# EAGLE board CSv2_exp_boardx (EAGLE 9.6.2)
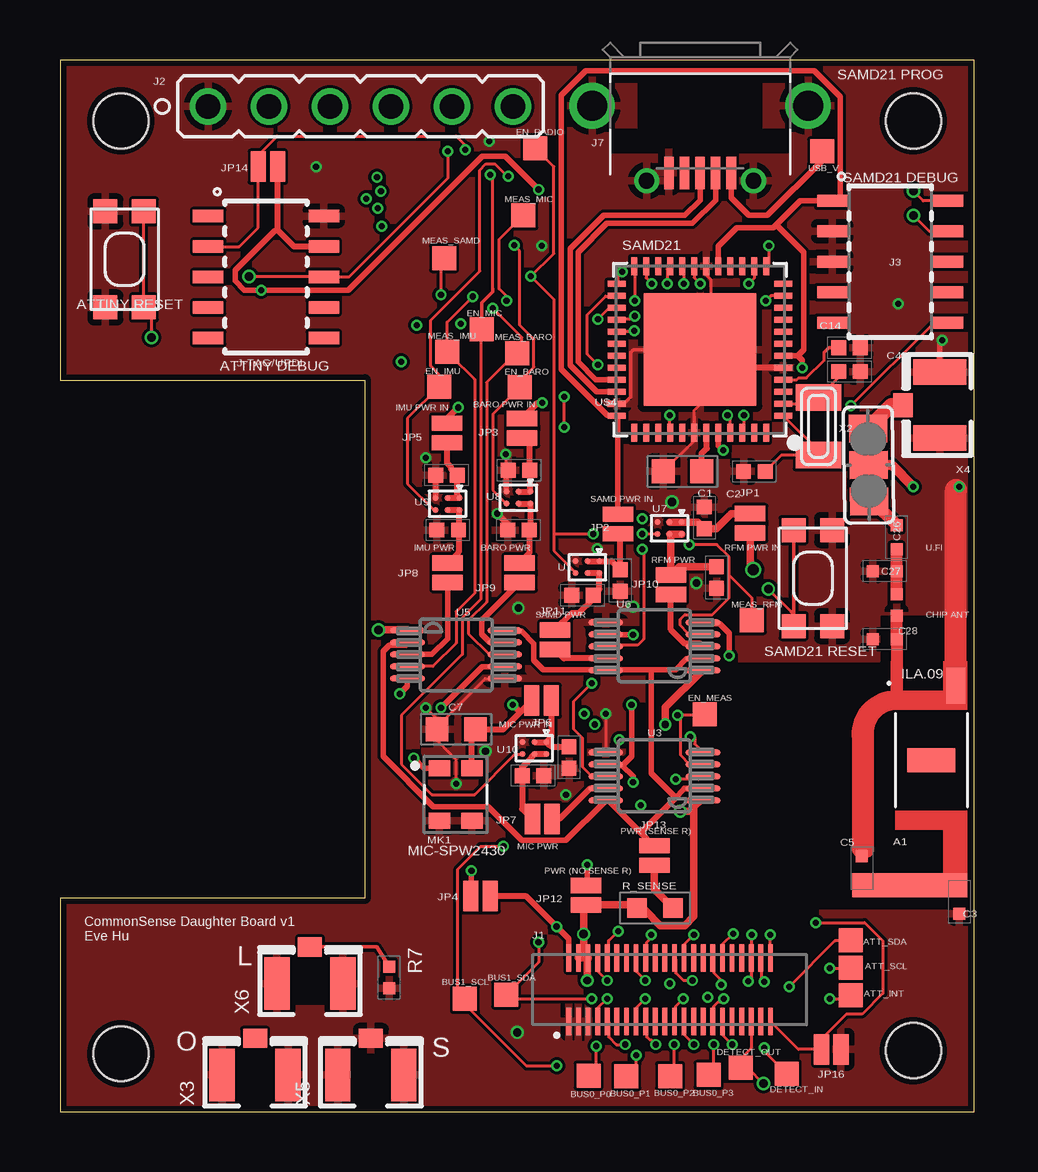
[diagram p0: board, top side]
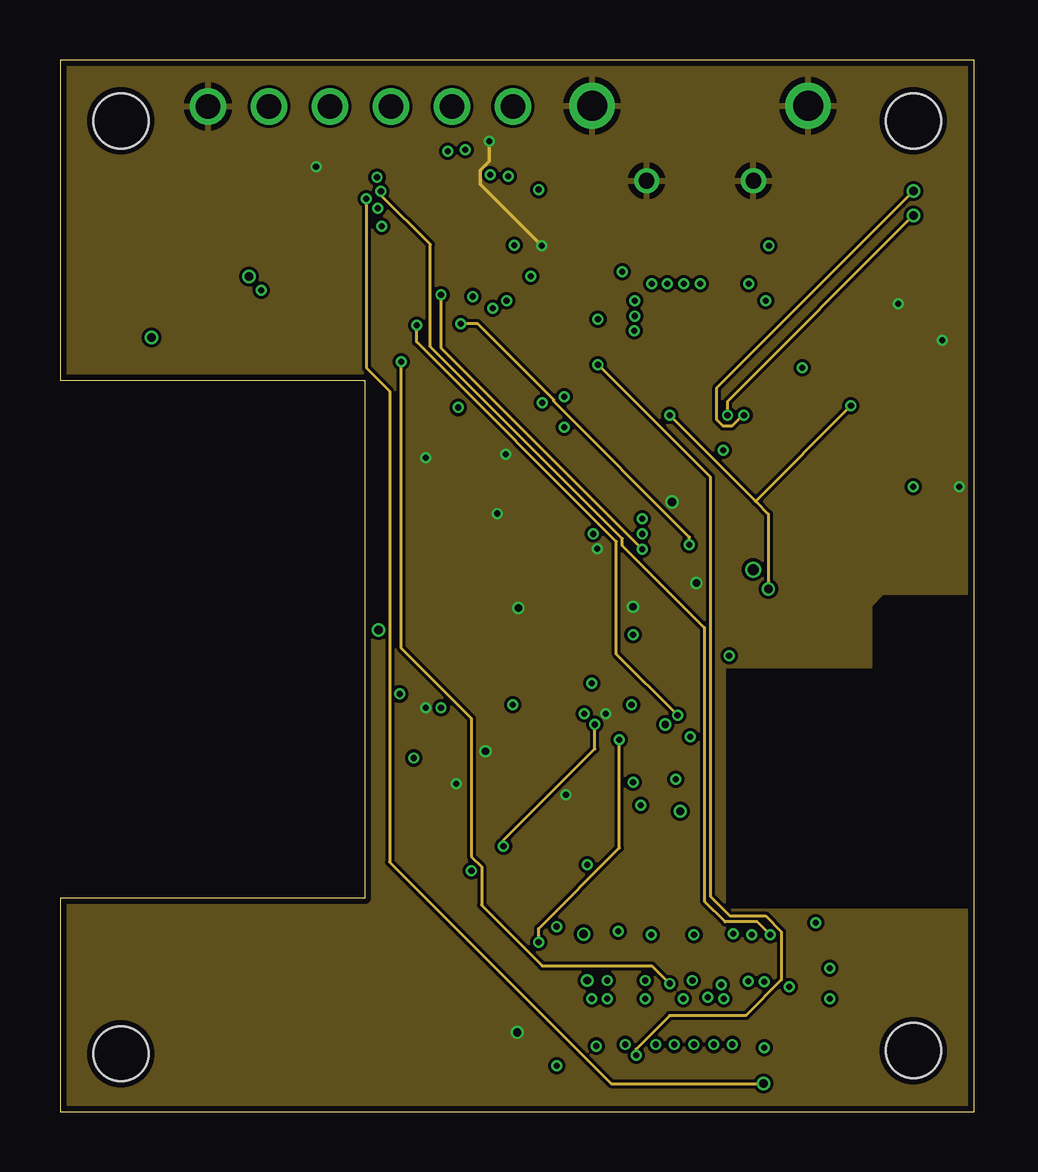
[diagram p1: board, inner layer Route2]
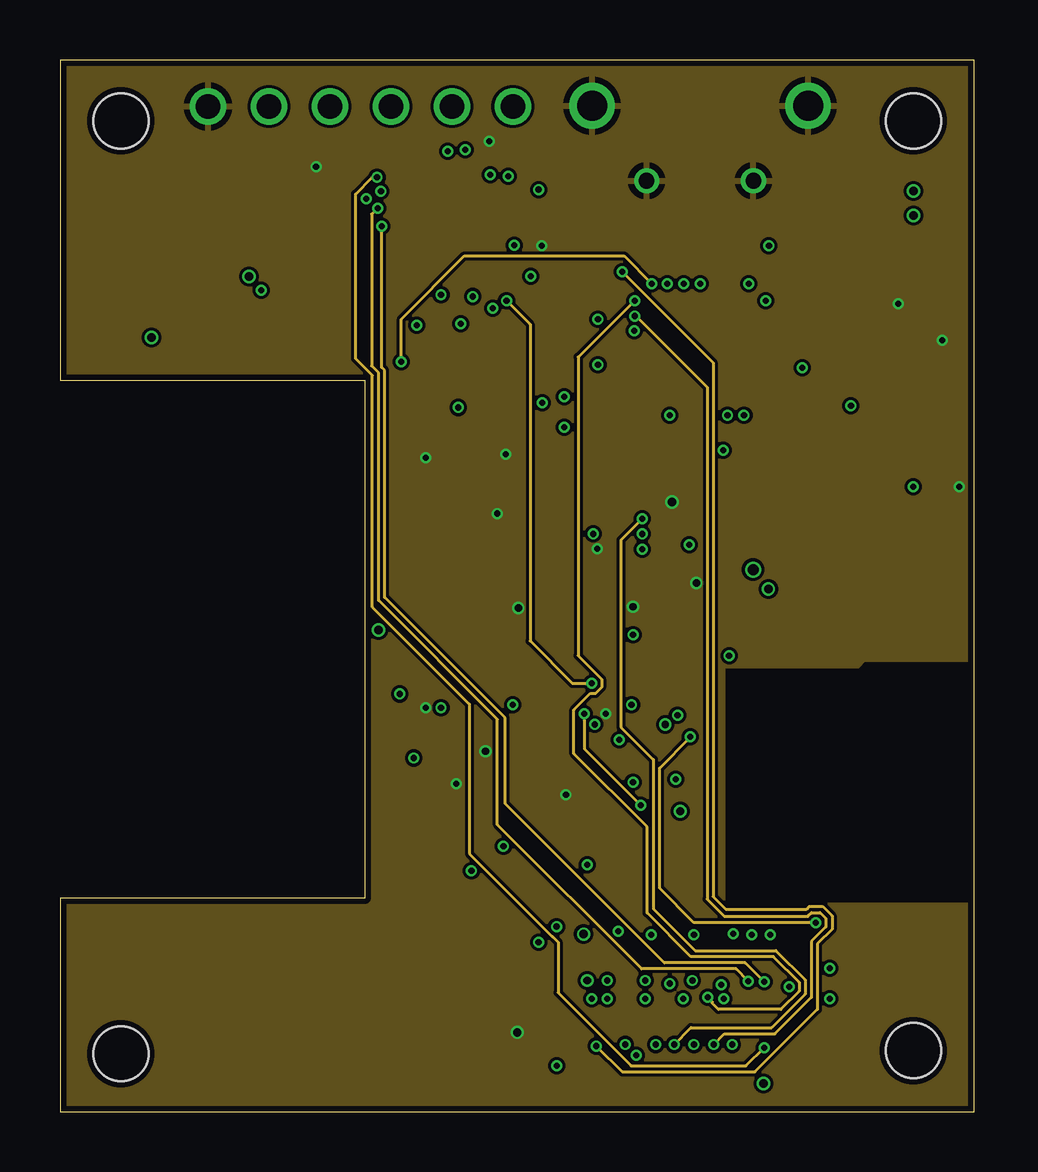
[diagram p2: board, inner layer Route15]
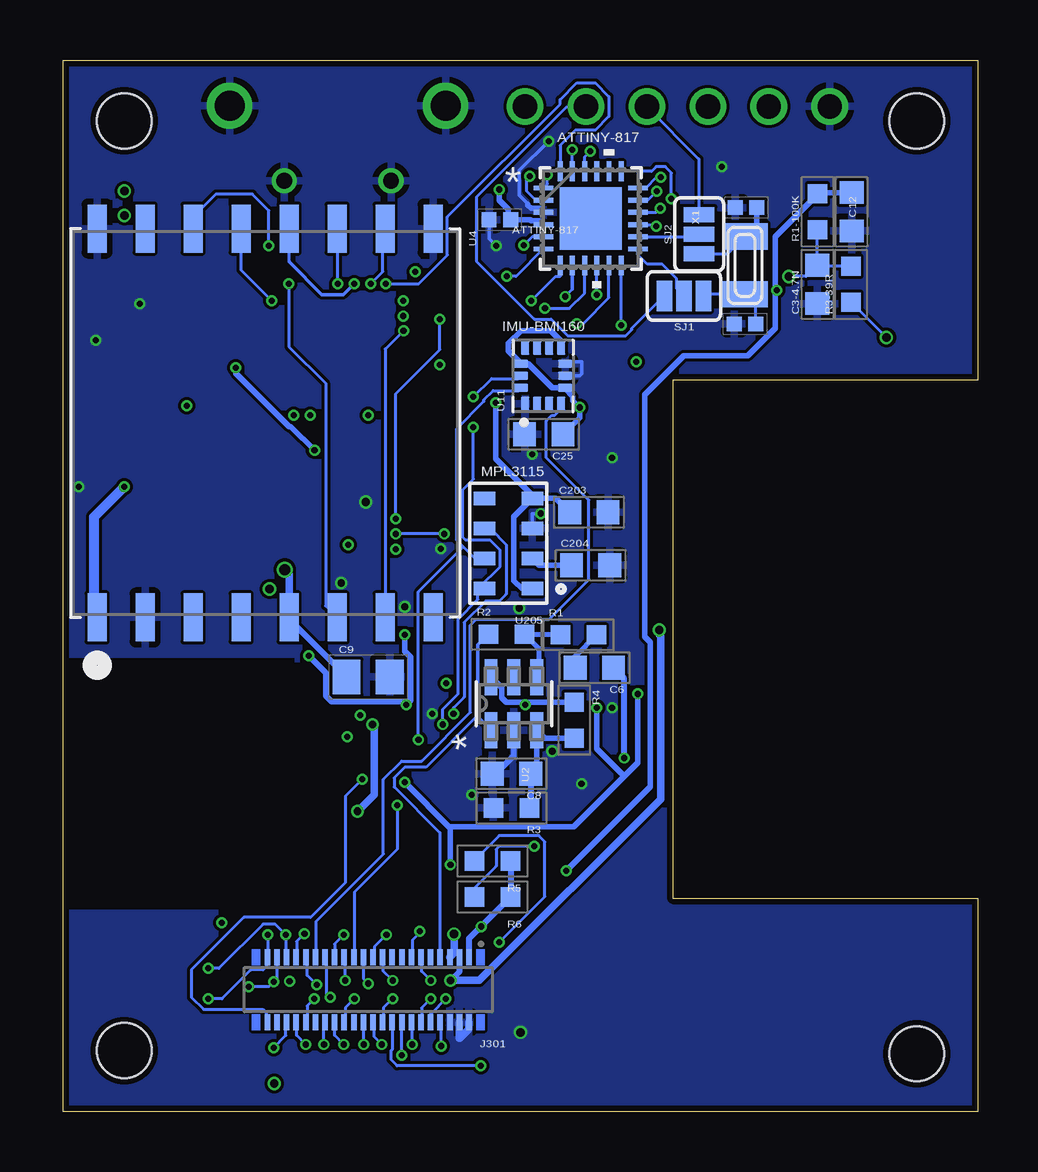
[diagram p3: board, bottom side, seen from below]

Size 38.1 x 43.81 mm. Coordinates in mm from the lower left corner, seen from the top.
Outline: 0,0 38.1,0 38.1,43.81 0,43.81 0,30.48 12.7,30.48 12.7,8.89 0,8.89 0,0
Copper layers (1+2*15+16): Top 0.001778125mm / dielectric 0.231140625mm / Route2 0.01778125mm / dielectric 0.929640625mm / Route15 0.01778125mm / dielectric 0.231140625mm / Bottom 0.01778125mm
Design rules "CSv2_bittele_4-layer *": minimum track width 4mil, minimum drill 6mil, track to track 4mil, track to pad 4mil, pad to pad 4mil, via to via 4mil, smd to smd 4mil, copper to edge 10mil, drill to drill 5mil, minimum pad ring 4mil, minimum via ring 4mil, stop-mask expansion 4mil, vias tented up to drill 0mil, thermal gap 10mil
Net classes: 0 default: width 0.127 mm, drill 0.254 mm, clearance 0.127 mm; 1 power: width 0.229 mm, drill 0.254 mm, clearance 0.127 mm; 2 diff_pair: width 0.229 mm; 3 12mil: width 0.305 mm, drill 0.33 mm; 8 GND: width 0.127 mm
Holes 2.29 mm at 35.56,2.54 2.54,41.27 35.56,41.27 2.54,2.41

## Footprints (pad centres in the part's own frame; a part is rotated, then mirrored left to right if it is on the bottom)
ILA_09_CHIP_ANTENNA2 = smd 1.5 x 0.8: G1 -3.11,1.02 | smd 1 x 4.8: G2 5.2,-0.9 | smd 1 x 2: NC 0,0
TP10SQ = smd 1 x 1: TP 0,0
ATTINY817-MFRQFN24_RX4MC-L_QFN24_4X4MC = smd 0.813 x 0.203: 1 -1.968,1.27; 2 -1.968,0.762; 3 -1.968,0.254; 4 -1.968,-0.254; 5 -1.968,-0.762; 6 -1.968,-1.27; 13 1.968,-1.27; 14 1.968,-0.762; 15 1.968,-0.254; 16 1.968,0.254; 17 1.968,0.762; 18 1.968,1.27 | smd 0.203 x 0.813: 7 -1.27,-1.968; 8 -0.762,-1.968; 9 -0.254,-1.968; 10 0.254,-1.968; 11 0.762,-1.968; 12 1.27,-1.968; 19 1.27,1.968; 20 0.762,1.968; 21 0.254,1.968; 22 -0.254,1.968; 23 -0.762,1.968; 24 -1.27,1.968 | smd 2.591 x 2.591: 25 0,0
C0603 = smd 0.95 x 1: 1 -0.8,0; 2 0.8,0
C0402 = smd 0.62 x 0.62: 1 -0.45,0; 2 0.45,0
C0402-S = smd 0.5 x 0.5: 1 -0.5,0; 2 0.5,0
C0805 = smd 1.15 x 1.45: 1 -0.9,0; 2 0.9,0
HRS_DF40HC(3.0)-44DS-0.4V(51) = smd 0.2 x 1.14: 1 -4.2,-1.32; 2 -4.2,1.32; 3 -3.8,-1.32; 4 -3.8,1.32; 5 -3.4,-1.32; 6 -3.4,1.32; 7 -3,-1.32; 8 -3,1.32; 9 -2.6,-1.32; 10 -2.6,1.32; 11 -2.2,-1.32; 12 -2.2,1.32; 13 -1.8,-1.32; 14 -1.8,1.32; 15 -1.4,-1.32; 16 -1.4,1.32; 17 -1,-1.32; 18 -1,1.32; 19 -0.6,-1.32; 20 -0.6,1.32; 21 -0.2,-1.32; 22 -0.2,1.32; 23 0.2,-1.32; 24 0.2,1.32; 25 0.6,-1.32; 26 0.6,1.32; 27 1,-1.32; 28 1,1.32; 29 1.4,-1.32; 30 1.4,1.32; 31 1.8,-1.32; 32 1.8,1.32; 33 2.2,-1.32; 34 2.2,1.32; 35 2.6,-1.32; 36 2.6,1.32; 37 3,-1.32; 38 3,1.32; 39 3.4,-1.32; 40 3.4,1.32; 41 3.8,-1.32; 42 3.8,1.32; 43 4.2,-1.32; 44 4.2,1.32
HEADER-1X6 = drill 1.016: 1 0,-6.35; 2 0,-3.81; 3 0,-1.27; 4 0,1.27; 5 0,3.81; 6 0,6.35
SAMTECH_FTSH-105-01 = smd 0.508 x 1.27: 1 -2.54,-2.413; 2 -2.54,2.413; 3 -1.27,-2.413; 4 -1.27,2.413; 5 0,-2.413; 6 0,2.413; 7 1.27,-2.413; 8 1.27,2.413; 9 2.54,-2.413; 10 2.54,2.413
USB-THRU-ZX62D-AB-5P8 = smd 1.35 x 0.4: D+ 2.8,0; D- 2.8,0.65; GND 2.8,-1.3; USBID 2.8,-0.65; VBUS 2.8,1.3 | drill 1.25 pad 1.9: S1 0,-4.5; S2 0,4.5 | drill 0.65 pad 1.05: S3 3.125,2.225; S4 3.125,-2.225
HRS_DF40C-44DP-0.4V(51) = smd 0.23 x 0.66: 1 -4.2,1.355; 2 -4.2,-1.355; 3 -3.8,1.355; 4 -3.8,-1.355; 5 -3.4,1.355; 6 -3.4,-1.355; 7 -3,1.355; 8 -3,-1.355; 9 -2.6,1.355; 10 -2.6,-1.355; 11 -2.2,1.355; 12 -2.2,-1.355; 13 -1.8,1.355; 14 -1.8,-1.355; 15 -1.4,1.355; 16 -1.4,-1.355; 17 -1,1.355; 18 -1,-1.355; 19 -0.6,1.355; 20 -0.6,-1.355; 21 -0.2,1.355; 22 -0.2,-1.355; 23 0.2,1.355; 24 0.2,-1.355; 25 0.6,1.355; 26 0.6,-1.355; 27 1,1.355; 28 1,-1.355; 29 1.4,1.355; 30 1.4,-1.355; 31 1.8,1.355; 32 1.8,-1.355; 33 2.2,1.355; 34 2.2,-1.355; 35 2.6,1.355; 36 2.6,-1.355; 37 3,1.355; 38 3,-1.355; 39 3.4,1.355; 40 3.4,-1.355; 41 3.8,1.355; 42 3.8,-1.355; 43 4.2,1.355; 44 4.2,-1.355
ATTINY_AVR_DEBUG = smd 0.508 x 1.27: 1 -2.54,-2.413; 2 -2.54,2.413; 3 -1.27,-2.413; 4 -1.27,2.413; 5 0,-2.413; 6 0,2.413; 7 1.27,-2.413; 8 1.27,2.413; 9 2.54,-2.413; 10 2.54,2.413
SMT-JUMPER_2_NC_PASTE_NO-SILK = smd 0.635 x 1.27: 1 -0.406,0; 2 0.406,0
SMT-JUMPER_2_NO_PASTEFREE_NO-SILK = smd 0.635 x 1.27: 1 -0.406,0; 2 0.406,0
L0402 = smd 0.5 x 0.5: 1 -0.45,0; 2 0.45,0
MIC_SPW2430HR5H-B = smd 0.9 x 0.66: 1 -0.675,1.095; 2 -0.675,-1.095; 3 0.675,-1.095; 4 0.675,1.095
R0603 = smd 0.8 x 0.8: 1 -0.75,0; 2 0.75,0
R0402 = smd 0.5 x 0.5: 1 -0.45,0; 2 0.45,0
SMT-JUMPER_3_1-NC_PASTE_SILK = smd 0.635 x 1.27: 1 -0.813,0; 2 0,0; 3 0.813,0
JUMPER_SJ_2 = smd 1.168 x 1.6: 1 -1.524,0; 2 0,0; 3 1.524,0
KMR2 = smd 1 x 1: 1 2,0.8; 2 2,-0.8; 3 -2,0.8; 4 -2,-0.8
WLCSP6_2X3 = smd 0.254 x 0.254: A1 -0.25,0.5; A2 0.25,0.5; B1 -0.25,0; B2 0.25,0; C1 -0.25,-0.5; C2 0.25,-0.5
RJ_6 = smd 1.511 x 0.531: 1 -1.1,0.95; 2 -1.1,0; 3 -1.1,-0.95; 4 1.1,-0.95; 5 1.1,0; 6 1.1,0.95
DGS0010A_L = smd 1.45 x 0.25: 1 -2.025,1; 2 -2.025,0.5; 3 -2.025,0; 4 -2.025,-0.5; 5 -2.025,-1; 6 2.025,-1; 7 2.025,-0.5; 8 2.025,0; 9 2.025,0.5; 10 2.025,1
RFM-MOD = smd 2 x 0.8: 1P 8.1,-7; 2P 8.1,-5; 3P 8.1,-3; 4P 8.1,-1; 5P 8.1,1; 6P 8.1,3; 7P 8.1,5; 8P 8.1,7; 9P -8.1,7; 10P -8.1,5; 11P -8.1,3; 12P -8.1,1; 13P -8.1,-1; 14P -8.1,-3; 15P -8.1,-5; 16P -8.1,-7
PQFN50P300X250X88-14N = smd 0.59 x 0.35: 1 -1.165,0.75; 2 -1.165,0.25; 3 -1.165,-0.25; 4 -1.165,-0.75; 8 1.165,-0.75; 9 1.165,-0.25; 10 1.165,0.25; 11 1.165,0.75 | smd 0.35 x 0.59: 5 -0.5,-0.915; 6 0,-0.915; 7 0.5,-0.915; 12 0.5,0.915; 13 0,0.915; 14 -0.5,0.915
MPL3115A2_PSON125P300X500X120-8N = smd 0.9 x 0.55: 1 -1,1.875; 2 -1,0.625; 3 -1,-0.625; 4 -1,-1.875; 5 1,-1.875; 6 1,-0.625; 7 1,0.625; 8 1,1.875
MICROBUILDER_TQFN48_7MM = smd 0.25 x 0.75: 1 -2.75,-3.475; 2 -2.25,-3.475; 3 -1.75,-3.475; 4 -1.25,-3.475; 5 -0.75,-3.475; 6 -0.25,-3.475; 7 0.25,-3.475; 8 0.75,-3.475; 9 1.25,-3.475; 10 1.75,-3.475; 11 2.25,-3.475; 12 2.75,-3.475; 25 2.75,3.475; 26 2.25,3.475; 27 1.75,3.475; 28 1.25,3.475; 29 0.75,3.475; 30 0.25,3.475; 31 -0.25,3.475; 32 -0.75,3.475; 33 -1.25,3.475; 34 -1.75,3.475; 35 -2.25,3.475; 36 -2.75,3.475 | smd 0.75 x 0.25: 13 3.475,-2.75; 14 3.475,-2.25; 15 3.475,-1.75; 16 3.475,-1.25; 17 3.475,-0.75; 18 3.475,-0.25; 19 3.475,0.25; 20 3.475,0.75; 21 3.475,1.25; 22 3.475,1.75; 23 3.475,2.25; 24 3.475,2.75; 37 -3.475,2.75; 38 -3.475,2.25; 39 -3.475,1.75; 40 -3.475,1.25; 41 -3.475,0.75; 42 -3.475,0.25; 43 -3.475,-0.25; 44 -3.475,-0.75; 45 -3.475,-1.25; 46 -3.475,-1.75; 47 -3.475,-2.25; 48 -3.475,-2.75 | smd 4.7 x 4.7: THERMAL 0,0
ADAFRUIT2_XTAL3215 = smd 1.1 x 1.9: P$1 1.2,0; P$2 -1.2,0
U.FL = smd 2.2 x 1.05: 1 0,1.375; 2 0,-1.375 | smd 0.8 x 1: 3 1.525,0

## Placement (x,y rotation side)
A1  ILA09_CHIP_ANTENNA  [ILA_09_CHIP_ANTENNA2]  36.31,14.64 270 top
ATT_INT  TPTP10SQ  [TP10SQ]  32.94,4.85 0 top
ATT_SCL  TPTP10SQ  [TP10SQ]  32.94,5.99 0 top
ATT_SDA  TPTP10SQ  [TP10SQ]  32.94,7.14 0 top
ATTINY-817  ATTINY817-MFRQFN24_RX4MC-L_ATTINY817-MFR  [ATTINY817-MFRQFN24_RX4MC-L_QFN24_4X4MC]  16.13,37.21 0 bottom
BUS0_P0  TPTP10SQ  [TP10SQ]  22.02,1.5 0 top
BUS0_P1  TPTP10SQ  [TP10SQ]  23.6,1.47 0 top
BUS0_P2  TPTP10SQ  [TP10SQ]  25.43,1.47 0 top
BUS0_P3  TPTP10SQ  [TP10SQ]  27.03,1.52 0 top
BUS1_SCL  TPTP10SQ  [TP10SQ]  16.87,4.7 0 top
BUS1_SDA  TPTP10SQ  [TP10SQ]  18.59,4.88 0 top
C1  1uF  [C0603]  25.93,26.67 180 top
C2  22pF  [C0402]  28.93,26.67 180 top
C3  3.9p  [C0402-S]  37.47,8.74 90 top
C3-4.7N  4.7n  [C0603]  6.68,34.47 90 bottom
C4  22pF  [C0402]  32.89,30.84 0 top
C5  2.2p  [C0402-S]  33.41,10.14 270 top
C6  4.7u  [C0603]  15.98,18.49 180 bottom
C7  0.1u  [C0603]  16.51,15.93 180 top
C8  1u  [C0603]  19.43,14.07 180 bottom
C9  10uF  [C0805]  25.4,18.11 0 bottom
C10  1u  [C0402]  21.77,21.51 180 top
C11  100n  [C0402]  23.34,22.12 270 top
C12  4.7nF  [C0603]  5.26,37.49 90 bottom
C13  100nF  [C0402]  19.91,37.16 0 bottom
C14  1uF  [C0402]  32.89,31.83 0 top
C15  13pF  [C0402]  9.65,37.67 0 bottom
C16  13pF  [C0402]  9.7,32.82 0 bottom
C17  1u  [C0402]  27.36,22.25 270 top
C18  100n  [C0402]  26.85,24.74 90 top
C19  1u  [C0402]  19.1,24.23 180 top
C20  100n  [C0402]  19.13,26.72 180 top
C21  1u  [C0402]  16.15,24.23 180 top
C22  100n  [C0402]  16.1,26.52 180 top
C23  1u  [C0402]  19.71,14 0 top
C24  100n  [C0402]  21.21,14.76 270 top
C25  0.1uF  [C0603]  18.08,28.22 180 bottom
C26  [C0402-S]  34.86,23.93 270 top
C27  [C0402-S]  34.36,22.52 180 top
C28  [C0402-S]  34.36,19.68 180 top
C203  0.1uF  [C0603]  16.21,24.97 0 bottom
C204  0.1uF  [C0603]  16.13,22.76 0 bottom
DETECT_IN  TPTP10SQ  [TP10SQ]  30.28,1.57 0 top
DETECT_OUT  TPTP10SQ  [TP10SQ]  28.37,1.83 0 top
EN_BARO  TPTP10SQ  [TP10SQ]  19.15,30.18 0 top
EN_IMU  TPTP10SQ  [TP10SQ]  15.8,30.2 0 top
EN_MEAS  TPTP10SQ  [TP10SQ]  26.87,16.56 0 top
EN_MIC  TPTP10SQ  [TP10SQ]  17.58,32.59 0 top
EN_RADIO  TPTP10SQ  [TP10SQ]  19.81,40.13 0 top
J1  HIROSE-DF40_44-PIN_CONNECTORS-RECEPTACLE  [HRS_DF40HC(3.0)-44DS-0.4V(51)]  25.4,5.08 0 top
J2  J-SERIAL-PORT  [HEADER-1X6]  12.52,41.88 270 top
J3  CORTEX_DEBUG_SMD  [SAMTECH_FTSH-105-01]  34.59,35.41 270 top
J7  J-USB-HIROSE-MICRO-USB  [USB-THRU-ZX62D-AB-5P8]  26.67,41.91 270 top
J301  HIROSE-DF40_44-PIN_CONNECTORS-HEADER  [HRS_DF40C-44DP-0.4V(51)]  25.4,5.08 180 bottom
J-TAG/UPDI  ATTINY_AVR_DEBUG_SMD  [ATTINY_AVR_DEBUG]  8.59,34.77 270 top
JP1  JUMPER-SMT_2_NC_PASTELG_NO-SILK  [SMT-JUMPER_2_NC_PASTE_NO-SILK]  28.75,24.51 270 top
JP2  JUMPER-SMT_2_NC_PASTELG_NO-SILK  [SMT-JUMPER_2_NC_PASTE_NO-SILK]  23.24,24.49 90 top
JP3  JUMPER-SMT_2_NC_PASTELG_NO-SILK  [SMT-JUMPER_2_NC_PASTE_NO-SILK]  19.25,28.47 90 top
JP4  JUMPER-SMT_2_NC_PASTELG_NO-SILK  [SMT-JUMPER_2_NC_PASTE_NO-SILK]  17.53,8.99 180 top
JP5  JUMPER-SMT_2_NC_PASTELG_NO-SILK  [SMT-JUMPER_2_NC_PASTE_NO-SILK]  16.13,28.27 90 top
JP6  JUMPER-SMT_2_NC_PASTELG_NO-SILK  [SMT-JUMPER_2_NC_PASTE_NO-SILK]  20.07,17.12 180 top
JP7  JUMPER-SMT_2_NC_PASTELG_NO-SILK  [SMT-JUMPER_2_NC_PASTE_NO-SILK]  20.09,12.19 180 top
JP8  JUMPER-SMT_2_NC_PASTELG_NO-SILK  [SMT-JUMPER_2_NC_PASTE_NO-SILK]  16.15,22.45 90 top
JP9  JUMPER-SMT_2_NC_PASTELG_NO-SILK  [SMT-JUMPER_2_NC_PASTE_NO-SILK]  19.15,22.45 90 top
JP10  JUMPER-SMT_2_NC_PASTELG_NO-SILK  [SMT-JUMPER_2_NC_PASTE_NO-SILK]  25.45,21.95 90 top
JP11  JUMPER-SMT_2_NC_PASTELG_NO-SILK  [SMT-JUMPER_2_NC_PASTE_NO-SILK]  20.62,19.66 90 top
JP12  JUMPER-SMT_2_NC_PASTELG_NO-SILK  [SMT-JUMPER_2_NC_PASTE_NO-SILK]  21.92,9.02 90 top
JP13  JUMPER-SMT_2_NC_PASTELG_NO-SILK  [SMT-JUMPER_2_NC_PASTE_NO-SILK]  24.77,10.67 90 top
JP14  JUMPER-SMT_2_NO_PASTEFREE  [SMT-JUMPER_2_NO_PASTEFREE_NO-SILK]  8.66,39.37 180 top
JP16  JUMPER-SMT_2_NO_PASTEFREE  [SMT-JUMPER_2_NO_PASTEFREE_NO-SILK]  32.13,2.59 180 top
L1  L0402  [L0402]  34.86,21.11 270 top
MEAS_BARO  TPTP10SQ  [TP10SQ]  19.05,31.6 0 top
MEAS_IMU  TPTP10SQ  [TP10SQ]  16.13,31.65 0 top
MEAS_MIC  TPTP10SQ  [TP10SQ]  19.3,37.34 0 top
MEAS_RFM  TPTP10SQ  [TP10SQ]  28.83,20.47 0 top
MEAS_SAMD  TPTP10SQ  [TP10SQ]  16,35.56 0 top
MK1  SPW2430HR5H-B  [MIC_SPW2430HR5H-B]  16.48,13.21 0 top
R1  1.5k  [R0603]  16.64,19.86 0 bottom
R1-100K  100k  [R0603]  6.68,37.49 90 bottom
R2  100k  [R0603]  19.63,19.89 0 bottom
R3  10k  [R0603]  19.43,12.65 180 bottom
R3-39R  39r  [R0603]  5.28,34.47 90 bottom
R4  10k  [R0603]  16.81,16.31 270 bottom
R5  4.7k  [R0603]  20.22,10.44 180 bottom
R6  4.7k  [R0603]  20.22,8.94 180 bottom
R7  [R0402]  13.72,5.59 270 top
R_SENSE  1.33  [R0603]  24.79,8.48 0 top
SJ1  JUMPER-SMT_3_1-NC_PASTE_SILK  [SMT-JUMPER_3_1-NC_PASTE_SILK]  12.24,33.99 180 bottom
SJ2  JUMPER-SMT_3_1-NC_PASTE_SILK  [SMT-JUMPER_3_1-NC_PASTE_SILK]  11.61,36.55 90 bottom
SJ3  [JUMPER_SJ_2]  33.69,26.94 90.8 top
SW1  SPST_TACT-KMR2  [KMR2]  2.69,35.51 90 top
SW2  SPST_TACT-KMR2  [KMR2]  31.37,22.23 270 top
U1  LOADSWITCH-MIC94164  [WLCSP6_2X3]  21.97,22.68 270 top
U2  ADA4841-1YRJZ-R7  [RJ_6]  19.33,16.99 90 bottom
U3  Value  [DGS0010A_L]  24.77,13.97 180 top
U4  RFM69HCW  [RFM-MOD]  29.69,28.69 270 bottom
U5  Value  [DGS0010A_L]  16.51,19.05 0 top
U6  Value  [DGS0010A_L]  24.77,19.38 180 top
U7  LOADSWITCH-MIC94164  [WLCSP6_2X3]  25.4,24.31 270 top
U8  LOADSWITCH-MIC94164  [WLCSP6_2X3]  19.1,25.58 270 top
U9  LOADSWITCH-MIC94164  [WLCSP6_2X3]  16.15,25.32 270 top
U10  LOADSWITCH-MIC94164  [WLCSP6_2X3]  19.76,15.14 270 top
U11  BMI160  [PQFN50P300X250X88-14N]  18.11,30.66 90 bottom
U205  MPL3115A2  [MPL3115A2_PSON125P300X500X120-8N]  19.56,23.67 180 bottom
U$4  ATSAMD21G18_QFN  [MICROBUILDER_TQFN48_7MM]  26.67,31.75 90 top
USB_V  TPTP10SQ  [TP10SQ]  31.75,40.01 0 top
X1  32.768kHz  [ADAFRUIT2_XTAL3215]  9.7,35.26 270 bottom
X2  32.768  [ADAFRUIT2_XTAL3215]  31.6,28.55 270 top
X3  uFL  [U.FL]  8.13,1.52 90 top
X4  uFL  [U.FL]  36.65,29.44 180 top
X5  uFL  [U.FL]  12.95,1.52 90 top
X6  uFL  [U.FL]  10.41,5.33 90 top

## Library data of the parts
A1 SJ3 U$4 X1 X2 = CommonSense-DTR-v1
ATT_INT ATT_SCL ATT_SDA BUS0_P0 BUS0_P1-BUS0_P3 BUS1_SCL BUS1_SDA DETECT_IN DETECT_OUT EN_BARO EN_IMU EN_MEAS EN_MIC EN_RADIO MEAS_BARO MEAS_IMU MEAS_MIC MEAS_RFM MEAS_SAMD USB_V = TestPoints
ATTINY-817 = CommonSense-DTR-v1; MANUFACTURER_PART_NUMBER: ATTINY817MFR; VENDOR: Microchip
C1 C2 C3-4.7N C4 C6-C9 C14-C16 C25 C203 C204 = Capacitors; MANUFACTURER: Kemet; TC: X7R; TOL: 10%; VOLTAGE: 6.3V
C3 C5 C26-C28 = CommonSense-DTR-v1; MANUFACTURER: Kemet; TC: X7R; TOL: 10%; VOLTAGE: 6.3V
C10 C12 C13 C17 C19 C21 C23 = Capacitors; MANUFACTURER: Kemet; PARTNO: CC0402KRX5R5BB105; TC: X7R; TOL: 10%; VOLTAGE: 6.3V
C11 C18 C20 C22 C24 = Capacitors; MANUFACTURER: Kemet; PARTNO: CC0402KRX5R5BB104; TC: X7R; TOL: 10%; VOLTAGE: 6.3V
J1 J301 = Connectors; PART_NO: DF40HC(3.0)-44DS-0.4V(51)
J2 = Connectors; DESCRIPTION: Console; DIGIKEY: 2057-PH1-06-UA-ND; MANUFACTURER: Adam Tech; MPN: PH1-06-UA
J3 = Debuggers
J7 = Connectors; MANUFACTURER: Hirose; MPN: ZX62D-AB-5P8(30)
J-TAG/UPDI = CommonSense-DTR-v1; MANUFACTURER: Samtech Inc.; MPN: FTSH-105-01-L-DV-K-TR; SPICEPREFIX: X
JP1-JP13 = Connectors; BOM: EXCLUDE
JP14 JP16 SJ1 SJ2 X3-X6 = Connectors
L1 = Inductors
MK1 = SPW2430HR5H-B; AVAILABILITY: Unavailable; DESCRIPTION: Mic Mems Analog; MF: Knowles; MP: SPW2430HR5H-B; OC_NEWARK: unknown; PACKAGE: Knowles; PRICE: None
R1 R3 R4 = Resistors; MANUFACTURER: Panasonic; OC_NEWARK: unknown; TOL: 5%
R1-100K R3-39R R5-R7 = Resistors; MANUFACTURER: Panasonic; TOL: 5%
R2 = Resistors; MANUFACTURER: Panasonic; MF: BOURNS; MPN: 3549S-1AA-102A; OC_NEWARK: 17M3640; TOL: 5%
R_SENSE = Resistors; MANUFACTURER: Panasonic; PARTNO: CRCW06031R33FKEA; TOL: 5%
SW1 SW2 = adafruit
U1 U7-U10 = Switches; MANUFACTURER: Microchip Technology; MPN: MIC94164YCS-TR; PART_NUMBER: MIC94164; QUENCH: YES; SOFTSTART: YES
U2 = ADA1484; MANUFACTURER_PART_NUMBER: ADA48411YRJZR7; OC_NEWARK: unknown; SPICEMODEL: ADA4841; SPICEPREFIX: X; VENDOR: Analog Devices Inc
U3 U5 U6 = CommonSense-DTR-v1; APPLICATION_BUILDNUMBER: *; COMPTYPE: IC; MANUFACTURER: Texas Instruments; MOUNTTYPE: SMT; PACKAGEREFERENCE: DGS0010A; PARTNUMBER: TS3A24159DGSR; PIN_COUNT: 10; REFDES: RefDes; ROHS: Y; TYPE: TYPE
U4 = Radios; FCC: 2ASEORFM95C; MANUFACTURER: HopeRF; MPN: RFM95C
U11 = CommonSense-DTR-v1; AVAILABILITY: Unavailable; DESCRIPTION: Accelerometer, Gyroscope, 6 Axis Sensor I²C, SPI Output; DIGIKEY-PURCHASE-URL: https://snapeda.com/shop?store=DigiKey&id=104926; MF: Bosch; MP: BMI160; PACKAGE: LGA-14 Bosch; PRICE: None
U205 = Sensors; DESCRIPTION: Pressure Sensor, 50-110kpa, Lga-8; DIGI-KEY_PART_NUMBER: MPL3115A2-ND; DIGI-KEY_PURCHASE_URL: https://www.digikey.com/product-detail/en/nxp-usa-inc/MPL3115A2/MPL3115A2-ND/2817529?utm_source=snapeda&utm_medium=aggregator&utm_campaign=symbol; MANUFACTURER: NXP; MF: NXP USA; MP: MPL3115A2; MPN: MPL-3115A2; PACKAGE: LGA-8 NXP USA

## Nets
+3V3_ATT [power]: ATTINY-817.4 C12.2 C13.2 J-TAG/UPDI.4 JP4.2 JP14.1 R1-100K.2
+3V3_BARO [power]: C203.1 JP3.2 U205.1 U205.4
+3V3_BARO_IN [power]: C19.1 JP9.2 U8.A2 U8.B2
+3V3_BARO_OUT [power]: C20.1 JP3.1 U8.A1 U8.B1
+3V3_BARO_PWR [power]: JP9.1 U5.9
+3V3_DTR: J1.4 J1.6 J301.4 J301.6 JP12.1 R_SENSE.1 U3.1 U5.1 U6.1
+3V3_DTR0 [power]: J1.2 J301.2 JP4.1 R5.1 R6.1
+3V3_IMU [power]: C25.1 JP5.2 U11.5 U11.8 U11.12
+3V3_IMU_IN [power]: C21.1 JP8.2 U9.A2 U9.B2
+3V3_IMU_OUT [power]: C22.1 JP5.1 U9.A1 U9.B1
+3V3_IMU_PWR [power]: JP8.1 U5.3
+3V3_MEAS [power]: JP13.2 U3.2 U3.10 U5.2 U5.10 U6.2 U6.10
+3V3_MIC [power]: C7.1 JP6.2 MK1.4 R4.1 U2.6
+3V3_MIC_IN [power]: C23.1 JP7.2 U10.A2 U10.B2
+3V3_MIC_OUT [power]: C24.1 JP6.1 U10.A1 U10.B1
+3V3_MIC_PWR [power]: JP7.1 U3.9
+3V3_NMEAS [power]: JP12.2 U3.7 U5.5 U5.7 U6.5 U6.7
+3V3_RFM [power]: C9.1 JP1.2 U4.5P
+3V3_RFM_IN [power]: C17.1 JP10.2 U7.A2 U7.B2
+3V3_RFM_OUT [power]: C18.1 JP1.1 U7.A1 U7.B1
+3V3_RFM_PWR [power]: JP10.1 U6.3
+3V3_SAMD [power]: J3.1 JP2.2 U$4.6 U$4.17 U$4.36 U$4.44
+3V3_SAMD_IN [power]: C10.1 JP11.2 U1.A2 U1.B2
+3V3_SAMD_OUT [power]: C11.1 JP2.1 U1.A1 U1.B1
+3V3_SAMD_PWR [power]: JP11.1 U6.9
AREF: C14.1 U$4.4
AT_RESET: ATTINY-817.22 C3-4.7N.2 J-TAG/UPDI.6 R1-100K.1 R3-39R.2
AT_UPDI: ATTINY-817.23 J-TAG/UPDI.3 JP14.2
ATT_INT: ATT_INT.TP ATTINY-817.17 J1.44 J301.44
BUS0_AIN0: J301.8 R2.1 U2.1
BUS0_AIN1: J301.16
BUS0_GPIO0: ATTINY-817.24 J301.24 U$4.23
BUS0_GPIO1: J301.32 U$4.24
BUS0_SERCOM_P0: BUS0_P0.TP J301.7 U$4.25
BUS0_SERCOM_P1: BUS0_P1.TP J301.15 U$4.26
BUS0_SERCOM_P2: BUS0_P2.TP J301.23 U$4.27
BUS0_SERCOM_P3: BUS0_P3.TP J301.31 U$4.28
BUS1_AIN0: J301.10
BUS1_AIN1: J301.18
BUS1_GPIO0: J301.26 U205.6
BUS1_GPIO1: J301.34 U11.4
BUS1_SERCOM_P0: BUS1_SDA.TP J301.9 R5.2 U11.14 U205.7
BUS1_SERCOM_P1: BUS1_SCL.TP J301.17 R6.2 U11.13 U205.8
BUS1_SERCOM_P2: J301.25
BUS1_SERCOM_P3: J301.33
BUS2_AIN0: J1.8 J301.12
BUS2_AIN1: J1.16 J301.20
BUS2_GPIO0: J1.24 J301.28
BUS2_GPIO1: J1.32 J301.36
BUS2_SERCOM_P0: J1.7 J301.11
BUS2_SERCOM_P1: J1.15 J301.19
BUS2_SERCOM_P2: J1.23 J301.27
BUS2_SERCOM_P3: J1.31 J301.35
BUS3_AIN0: J1.10 J301.14
BUS3_AIN1: J1.18 J301.22
BUS3_GPIO0: J1.26 J301.30
BUS3_GPIO1: J1.34 J301.38
BUS3_SERCOM_P0: J1.9 J301.13
BUS3_SERCOM_P1: J1.17 J301.21
BUS3_SERCOM_P2: J1.25 J301.29
BUS3_SERCOM_P3: J1.33 J301.37
D_N [diff_pair]: J7.D- U$4.33
D_P [diff_pair]: J7.D+ U$4.34
DTR_DETECT_IN: ATTINY-817.18 DETECT_IN.TP J301.39
DTR_DETECT_OUT: ATTINY-817.19 DETECT_OUT.TP J1.39
EN_BARO: ATTINY-817.5 EN_BARO.TP U8.C2
EN_IMU: ATTINY-817.2 EN_IMU.TP U9.C2
EN_MEAS: ATTINY-817.12 EN_MEAS.TP U3.4
EN_MIC: ATTINY-817.1 EN_MIC.TP U10.C2
EN_RADIO: ATTINY-817.6 EN_RADIO.TP U1.C2 U7.C2
GND: A1.G1 ATTINY-817.3 C1.2 C2.2 C3-4.7N.1 C3.1 C4.2 C5.1 C7.2 C8.2 C9.2 C10.2 C11.2 C12.1 C13.1 C14.2 C15.1 C16.1 C17.2 C18.2 C19.2 C20.2 C21.2 C22.2 C23.2 C24.2 C25.2 C27.2 C28.1 C28.2 C203.2 C204.2 J1.1 J1.3 J1.5 J2.1 J3.3 J3.5 J7.GND J7.S1 J7.S2 J7.S3 J7.S4 J301.1 J301.3 J301.5 J-TAG/UPDI.2 JP16.1 L1.2 MK1.2 MK1.3 R3.2 R7.2 SW1.1 SW1.3 SW2.1 SW2.3 U1.C1 U2.2 U3.6 U4.2P U4.9P U4.16P U5.6 U6.6 U7.C1 U8.C1 U9.C1 U10.C1 U11.1 U11.6 U11.7 U205.3 U$4.5 U$4.18 U$4.35 U$4.42 U$4.THERMAL X3.1 X3.2 X4.1 X4.2 X5.1 X5.2 X5.3 X6.1 X6.2
IN+: C8.1 R3.1 R4.2 U2.3
IN-: R1.1 R2.2 U2.4
LORA_CS: U4.13P U$4.11
LORA_IRQ0: U4.6P U$4.14
LORA_IRQ1: U4.7P U$4.29
LORA_MISO: U4.10P U$4.21
LORA_MOSI: U4.11P U$4.19
LORA_RST: U4.14P U$4.13
LORA_SCK: U4.12P U$4.20
MASTER_I2C_SCL: ATT_SCL.TP ATTINY-817.16 J1.40 J301.40
MASTER_I2C_SDA: ATT_SDA.TP ATTINY-817.15 J1.42 J301.42
MEAS_BARO: ATTINY-817.9 MEAS_BARO.TP U5.8
MEAS_IMU: ATTINY-817.8 MEAS_IMU.TP U5.4
MEAS_MIC: ATTINY-817.7 MEAS_MIC.TP U3.8
MEAS_RFM: ATTINY-817.11 MEAS_RFM.TP U6.4
MEAS_SAMD: ATTINY-817.10 MEAS_SAMD.TP U6.8
N$1: C1.1 U$4.43
N$2: SJ3.3 X4.3
N$3: J2.5 SJ1.3
N$4: A1.G2 C3.2 C5.2
N$5: C2.1 U$4.1 X2.P$1
N$6: C6.2 R1.2
N$7: C4.1 U$4.2 X2.P$2
N$8: JP13.1 R_SENSE.2
N$9: C26.1 SJ3.1
N$10: C204.1 U205.2
N$11: R7.1 X6.3
N$12: R3-39R.1 SW1.2 SW1.4
N$13: C26.2 C27.1 L1.1
N$17: J7.VBUS USB_V.TP
N$18: ATTINY-817.13 SJ1.2
N$19: ATTINY-817.14 SJ2.2
N$20: J2.4 SJ2.3
N$22: C16.2 SJ1.1 X1.P$1
N$23: C15.2 SJ2.1 X1.P$2
N$26: SJ3.2 U4.1P
OUT: C6.1 MK1.1
POWERDOWN: U2.5
SAMD_!RESET: J3.10 SW2.2 SW2.4 U$4.40
SWCLK: J3.4 U$4.45
SWDIO: J3.2 U$4.46
V_SENSE_IN: J1.43 JP16.2 U3.5
V_SENSE_OUT: J301.43 U3.3

## Tracks (layer width: path | path; a pad name or v marks a point on that pad's centre or on a via)
+3V3_ATT  (via drill 0.25)
  Top 0.229: v19.94,38.42 18.54,39.81 17.6,39.81 12.01,34.23 v8.38,34.23 7.68,34.23 7.3,34.61 7.3,35.05 8.95,36.7 9.07,36.73 | v17.14,10.03 17.14,9.02 JP4.2
  Top 0.254: J-TAG/UPDI.4 9.75,36.04 9.07,36.73 JP14.1
  Bottom 0.229: ATTINY-817.4 18.26,37.12 18.6,37.12 18.64,37.16 C13.2 19.56,37.21 19.56,37.59 19.94,37.97 v19.94,38.42 | C12.2 6.63,38.29 R1-100K.2 6.73,38.16 8.45,36.45 8.45,34.23 | v17.14,10.03 13.65,13.53 13.65,19.56 13.88,19.79 13.88,29.87 12.26,31.5 9.59,31.5 8.45,32.64 8.45,34.23 | v8.38,34.23 8.45,34.23
+3V3_BARO  (via drill 0.25)
  Top 0.229: JP3.2 19.91,29.54 v20.09,29.54
  Bottom 0.229: C203.1 17.59,25.55 U205.4 | U205.4 18.56,25.67 20.09,27.2 v20.09,29.54 | U205.4 19.33,24.78 19.33,22.12 19,21.8 U205.1
+3V3_BARO_IN
  Top 0.254: U8.B2 U8.A2 19.6,24.28 C19.1 19.55,23.26 JP9.2
+3V3_BARO_OUT
  Top 0.254: JP3.1 19.58,27.74 C20.1 19.58,26.67 19.6,26.64 U8.A1 U8.B1
+3V3_BARO_PWR
  Top 0.229: U5.9 18.52,19.56 17.91,19.56 17.57,19.9 17.57,20.46 JP9.1
+3V3_DTR  (via drill 0.3, 0.33, 0.35)
  Top 0.305: J1.6 J1.4 | v21.97,5.46 21.97,6.29 J1.6 | 26.42,12.51 26.42,12.7 26.73,13.02 U3.1 | 26.42,12.51 26.42,8.13 26.04,7.75 25.02,7.75 24.38,8.38 24.13,8.38 R_SENSE.1 23.91,8.61 JP12.1 21.82,8.51 v21.82,7.39 21.82,6.58 J1.6 | v13.27,20.07 14.48,20.07 U5.1 | v25.22,16.13 25.22,16.84 26.73,18.35 U6.1 | 26.42,12.51 v25.84,12.51
  Bottom 0.254: J301.4 21.6,5.83 v21.97,5.46
  Bottom 0.305: v13.27,20.07 13.27,19.88 13.21,19.81 13.21,13.02 20.77,5.46 v21.97,5.46 | v25.22,16.13 25.15,16.05 25.15,13.21 v25.84,12.51 | J301.6 21.82,6.62 v21.82,7.39
+3V3_DTR0  (via drill 0.25)
  Top 0.229: J1.2 21.19,7.2
  Top 0.254: JP4.1 19.41,8.99 v20.69,7.71 21.19,7.2
  Bottom 0.229: v20.69,7.71
  Bottom 0.254: R5.1 R6.1 v20.69,7.71 21.2,7.21 J301.2
+3V3_IMU  (via drill 0.25)
  Top 0.229: JP5.2 16.13,28.88 v16.59,29.34
  Bottom 0.229: U11.8 17.37,32.12 17.79,32.54 19.02,32.54 19.56,32 19.56,31.69 U11.12 18.74,31.16 17.74,30.16 U11.5 17.2,30.11 16.87,29.79 16.87,29.62 v16.59,29.34 16.59,28.92 C25.1
+3V3_IMU_IN
  Top 0.254: U9.B2 U9.A2 16.6,25.02 C21.1 16.6,23.31 JP8.2
+3V3_IMU_OUT
  Top 0.254: U9.B1 U9.A1 16.55,25.68 C22.1 16.29,26.78 16.29,26.86 16.13,27.02 JP5.1
+3V3_IMU_PWR
  Top 0.229: U5.3 15.49,19.05 16.15,19.71 JP8.1
+3V3_MEAS
  Top 0.229: 24.64,18.41 25.65,18.41 26.1,18.86 26.73,18.86 U6.2 | 24.64,18.41 22.8,18.41 U6.10 22.67,18.41 20.13,18.41 19.75,18.8 19.75,19.49 19.24,20 18.54,20 U5.10 | 24.19,11.62 22.8,13.02 U3.10 22.67,12.89 21.08,11.3 19.24,11.3 17.84,12.7 15.56,12.7 13.46,14.8 13.46,19.18 13.72,19.43 14.41,19.43 U5.2 | 24.19,11.62 24.45,11.37 JP13.2 | 24.19,11.62 25.65,13.08 | 25.65,13.08 25.97,13.4 26.02,13.47 | 24.64,18.41 24.64,14.1 25.65,13.08
  Top 0.254: 26.02,13.47 U3.2
+3V3_MIC  (via drill 0.25)
  Top 0.229: 19.18,16.64 v18.86,16.95
  Top 0.254: JP6.2 19.18,16.64 18.47,15.93 C7.1 17.16,15.78 MK1.4
  Bottom 0.229: U2.6 19.84,17.65 19.84,17.24 19.66,17.06 18.86,17.06 | 18.86,17.06 R4.1 | v18.86,16.95 18.86,17.06
+3V3_MIC_IN
  Top 0.254: U10.A2 U10.B2 19.64,14.77 19.64,14.73 19.26,14.35 C23.1 19.26,12.62 JP7.2
+3V3_MIC_OUT
  Top 0.254: JP6.1 20.47,15.6 U10.A1 | U10.B1 U10.A1 | U10.A1 20.38,15.27 20.42,15.27 20.48,15.21 C24.1
+3V3_MIC_PWR
  Top 0.229: JP7.1 20.83,12.19 22.1,13.46 U3.9
+3V3_NMEAS  (via drill 0.25)
  Top 0.229: v21.97,10.29 21.97,9.46 JP12.2 | v23.88,13.72 23.88,13.97 23.43,14.41 | 23.43,14.41 22.8,14.41 U3.7 | v14.16,17.4 14.48,17.72 14.48,18.03 U5.5 | v15.88,16.83 17.59,18.54 18.48,18.54 U5.7 | v23.88,19.88 22.8,19.88 U6.7 | v23.81,16.95 23.81,14.8 23.43,14.41 | v27.88,18.99 27.88,19.94 27.5,20.32 26.8,20.32 U6.5
  Bottom 0.229: 21.97,11.81 v21.97,10.29 | v23.88,13.72 21.97,11.81 | v14.16,17.4 14.16,14.54 14.73,13.97 | 14.73,13.97 16.83,11.87 21.91,11.87 21.97,11.81 | v15.88,16.83 15.88,15.11 14.73,13.97 | v23.88,19.88 23.88,19.18 23.62,18.92 23.62,17.14 v23.81,16.95 23.94,17.08 26.92,17.08 27.18,17.34 27.18,18.29 v27.88,18.99
+3V3_RFM  (via drill 0.45)
  Top 0.305: v28.88,22.58 28.75,22.71 JP1.2
  Bottom 0.229: C9.1 28.69,20.5 U4.5P
  Bottom 0.305: U4.5P 28.69,22.39 v28.88,22.58
+3V3_RFM_IN
  Top 0.305: C17.1 25.8,22.7 JP10.2 25.45,24.01 U7.B2 U7.A2
+3V3_RFM_OUT
  Top 0.254: U7.B1 U7.A1 26.58,24.56 | 27.34,24.29 27.3,24.29 | 27.96,24.92 27.88,24.83
  Top 0.305: JP1.1 27.96,24.92 | 27.88,24.83 27.34,24.29 | 27.3,24.29 C18.1 26.58,24.56 U7.B1
+3V3_RFM_PWR
  Top 0.254: U6.3 26.67,19.5 26.03,19.5 25.45,20.08 JP10.1
+3V3_SAMD  (via drill 0.25)
  Top 0.229: U$4.17 27.42,36.06 28.19,36.83 29.72,36.83 29.84,36.96 | 29.84,36.96 30.84,37.95 J3.1 32.51,37.95 32.51,42.29 31.43,43.37 21.91,43.37 20.89,42.35 20.89,30.92 22.8,29.02 23.11,29.02 U$4.36 23.24,28.96 JP2.2 | U$4.6 30.74,31.5 | 30.74,31.5 30.99,31.75 30.99,35.81 29.84,36.96 | v27.64,27.55 27.43,27.75 27.43,28.26 U$4.44 | v30.92,30.99 30.92,31.3 30.8,31.43 30.74,31.5
  Bottom 0.229: v27.64,27.55 28.63,28.54 28.69,28.54 30.92,30.77 v30.92,30.99
+3V3_SAMD_IN
  Top 0.254: JP11.2 21.34,20.78 21.64,20.78 22.22,21.35 C10.1 22.47,21.77 U1.A2 U1.B2
+3V3_SAMD_OUT
  Top 0.254: U1.B1 U1.A1 22.98,22.93 C11.1 23.34,23.98 JP2.1
+3V3_SAMD_PWR
  Top 0.254: U6.9 21,18.88 JP11.1
AREF
  Top 0.127: U$4.4 30.71,30.5 30.77,30.57 31.1,30.57 31.83,31.3 31.83,31.63
  Top 0.152: C14.1 32.03,31.83 31.83,31.63
AT_RESET  (via drill 0.25, 0.35)
  Top 0.127: v7.87,34.8 10.97,34.8 | v16.15,40.01 16.15,38.89 12.04,34.77 J-TAG/UPDI.6
  Top 0.229: 10.97,34.8 J-TAG/UPDI.6
  Bottom 0.127: R3-39R.2 6.63,35.22 | R1-100K.1 C3-4.7N.2 7.15,34.8 v7.87,34.8 | ATTINY-817.22 16.38,39.78 v16.15,40.01
  Bottom 0.254: 6.63,35.22 C3-4.7N.2
AT_UPDI  (via drill 0.25)
  Top 0.127: J-TAG/UPDI.3 7.47,36.04 8.26,36.83 JP14.2 | 8.26,39.85 9.04,40.64 16.51,40.64 16.89,40.26 v16.89,40.08
  Top 0.229: JP14.2 8.26,39.85
  Bottom 0.127: ATTINY-817.23 v16.89,40.08
ATT_INT  (via drill 0.25)
  Top 0.127: v29.59,7.37 29.59,6.41 J1.44 | v32.07,4.7 32.79,4.7 ATT_INT.TP
  Route2 0.127: v13.37,38.34 13.37,38.19 15.43,36.13 15.43,31.88 23.43,23.88 23.43,23.58 26.85,20.17 26.85,8.76 27.71,7.9 29.06,7.9 v29.59,7.37
  Bottom 0.127: v29.59,7.37 29.59,6.48 J301.44 29.65,6.41 29.65,6.03 29.78,5.91 30.29,5.91 31.5,4.7 v32.07,4.7 | ATTINY-817.17 13.74,37.97 v13.37,38.34
BUS0_AIN0
  Bottom 0.127: J301.8 22.42,6.48 22.42,11.62 24.32,13.53 24.32,13.91 23.88,14.35 22.99,14.35 20.89,16.45 20.83,16.44
  Bottom 0.152: U2.1 20.83,16.44 20.83,19.44 R2.1
BUS0_GPIO0  (via drill 0.25)
  Top 0.127: U$4.23 24.42,34.74 v24.66,34.49
  Route2 0.127: v14.22,31.24 14.22,19.3 17.14,16.38 17.14,10.63 17.56,10.21 17.56,8.6 20.09,6.07 24.66,6.07 v25.4,5.33
  Route15 0.127: v14.22,31.24 14.22,33.02 16.85,35.65 23.51,35.65 v24.66,34.49
  Bottom 0.127: ATTINY-817.24 17.4,40.26 16.76,40.89 15.94,40.89 15.37,41.47 15.37,42.29 15.94,42.86 16.7,42.86 17.4,42.16 17.4,41.97 22.1,37.27 22.1,35.69 23.3,34.48 v24.65,34.48 v24.66,34.49 | J301.24 25.6,5.53 v25.4,5.33
BUS0_GPIO1  (via drill 0.25)
  Top 0.127: v23.94,33.78 23.94,35.18 U$4.24
  Route15 0.127: v26.99,4.76 27.18,4.57 27.18,4.51 27.43,4.25 30.04,4.25 30.8,5.02 30.8,5.38 29.73,6.45 26.29,6.45 24.46,8.28 24.46,11.86 21.41,14.91 21.41,16.73 22.1,17.42 22.32,17.42 22.57,17.67 22.57,18.02 21.59,19 21.59,31.43 v23.94,33.78
  Bottom 0.127: v26.99,4.76 27.13,4.9 27.13,6.36 J301.32
BUS0_SERCOM_P0  (via drill 0.25)
  Top 0.127: v22.35,2.73 22.35,1.83 BUS0_P0.TP | v23.43,34.99 23.24,34.8 23.24,34.54 U$4.25
  Route15 0.127: v22.35,2.73 23.43,1.65 28.96,1.65 31.56,4.25 31.56,6.99 32.17,7.59 32.17,8.15 31.77,8.55 31.22,8.55 31.11,8.44 27.74,8.44 27.22,8.96 27.22,31.2 v23.43,34.99
  Bottom 0.127: v22.35,2.73 22.35,3.68 J301.7
BUS0_SERCOM_P1  (via drill 0.25)
  Top 0.127: v24,2.35 24,1.88 BUS0_P1.TP | v22.42,31.11 21.97,31.56 21.97,33.21 22.73,33.97 23.18,33.97 U$4.26
  Route2 0.127: v24,2.35 24,2.6 25.4,4 28.57,4 30.06,5.49 30.06,7.49 29.4,8.15 27.91,8.15 27.1,8.97 27.1,26.44 v22.43,31.11 v22.42,31.11
  Bottom 0.127: v24,2.35 24,3.68 J301.15
BUS0_SERCOM_P2  (via drill 0.25)
  Top 0.127: v25.59,2.79 25.59,1.64 BUS0_P2.TP | v22.42,33.02 22.86,33.47 23.18,33.47 U$4.27
  Route15 0.127: v25.59,2.79 26.29,3.49 29.65,3.49 31.05,4.89 31.05,5.49 29.83,6.71 26.47,6.71 24.73,8.45 24.73,14.66 23.37,16.02 23.37,23.81 v24.26,24.7
  Bottom 0.127: v25.59,2.79 25.59,3.68 J301.23 | v22.42,33.02 22.42,31.75 24.26,29.91 v24.26,24.7
BUS0_SERCOM_P3  (via drill 0.25)
  Top 0.127: v27.24,2.79 27.24,1.74 BUS0_P3.TP | v23.94,33.15 23.81,33.02 23.24,33.02 U$4.28
  Route15 0.127: v23.94,33.15 24.07,33.02 24.13,33.02 26.96,30.19 26.96,8.85 27.69,8.13 31.16,8.13 31.32,8.29 31.67,8.29 31.91,8.05 31.91,7.7 31.3,7.09 31.3,4.76 29.78,3.24 27.69,3.24 v27.24,2.79
  Bottom 0.127: v27.24,2.79 27.24,3.68 J301.31
BUS1_GPIO0  (via drill 0.25)
  Route15 0.127: v24.19,12.76 21.84,15.11 v21.84,16.57
  Bottom 0.127: v24.19,12.76 24.19,10.92 25.97,9.14 25.97,6.48 J301.26 | v21.84,16.57 21.84,16.83 21.4,17.27 21.4,20.38 20.51,21.27 19.94,21.27 19.65,21.57 19.65,23.62 20.32,24.3 U205.6
BUS1_GPIO1
  Bottom 0.127: J301.34 27.56,6.48 27.56,7.94 24.77,10.73 24.77,13.84 24,14.61 23.18,14.61 21.14,16.64 21.14,20.26 20.89,20.51 17.86,20.51 16.2,22.16 16.2,25.48 17.97,27.24 17.97,28.78 17.74,29.01 17.63,29.01 17.36,29.28 U11.4
BUS1_SERCOM_P0  (via drill 0.25)
  Top 0.127: v22.16,4.7 18.54,4.7 BUS1_SDA.TP 19.94,6.22 v19.94,7.05
  Route2 0.127: v23.3,15.49 23.3,10.99 19.94,7.62 v19.94,7.05
  Bottom 0.127: 21.43,23.53 20.95,23.05 20.57,23.05 U205.7 | 21.43,23.53 21.72,23.81 21.72,28.45 20.57,29.59 20.57,29.65 20.19,30.04 19.12,30.04 U11.14 | v22.16,4.7 22.8,4.06 22.8,3.75 J301.9 | v19.94,7.05 18.03,8.95 18.03,11.24 18.29,11.49 19.94,11.49 20.95,10.48 R5.2 | 21.43,23.53 23.3,21.65 v23.3,15.49
BUS1_SERCOM_P1  (via drill 0.25)
  Top 0.127: v21.02,28.51 v21.02,29.78 | v20.7,1.91 19.43,1.91 16.87,4.47 BUS1_SCL.TP 16.57,4.7 16.57,10.1 17.53,11.05 v18.48,11.05
  Route2 0.127: v22.29,16.13 22.29,15.11 18.48,11.3 v18.48,11.05
  Bottom 0.127: v21.02,29.78 20.26,30.54 19.14,30.54 U11.13 | v21.02,28.51 21.02,26.35 21.46,25.91 21.46,23.94 21.34,23.81 20.32,23.81 19.9,23.39 19.9,22.71 20.77,21.84 20.6,21.84 U205.8 20.83,21.51 20.83,21.34 21.65,20.51 21.65,17.4 22.29,16.76 v22.29,16.13 | v20.7,1.91 24.19,1.91 24.45,2.16 24.45,2.54 24.38,2.6 24.38,3.68 J301.17 | v18.48,11.05 19.94,11.05 20.07,10.92 20.07,10.22 20.95,9.34 20.95,8.95 R6.2
BUS2_AIN0  (via drill 0.25)
  Top 0.127: v22.8,5.46 22.42,5.84 22.42,6.35 J1.8
  Bottom 0.127: v22.8,5.46 23.18,5.84 23.18,6.41 J301.12
BUS2_AIN1  (via drill 0.25)
  Top 0.127: v24.38,5.46 24,5.84 24,6.35 J1.16
  Bottom 0.127: v24.38,5.46 24.77,5.84 24.77,6.41 J301.20
BUS2_GPIO0  (via drill 0.25)
  Top 0.127: v26.35,5.46 25.97,5.46 25.65,5.78 25.65,6.35 J1.24
  Bottom 0.127: v26.35,5.46 26.35,6.41 J301.28
BUS2_GPIO1  (via drill 0.25)
  Top 0.127: v27.55,5.28 27.55,5.47 27.24,5.78 27.24,6.35 J1.32
  Bottom 0.127: v27.55,5.28 27.94,5.68 27.94,6.41 J301.36
BUS2_SERCOM_P0  (via drill 0.25)
  Top 0.127: v22.8,4.7 22.42,4.32 22.42,3.81 J1.7
  Bottom 0.127: v22.8,4.7 23.18,4.32 23.18,3.75 J301.11
BUS2_SERCOM_P1  (via drill 0.25)
  Top 0.127: v24.38,4.7 24,4.32 24,3.81 J1.15
  Bottom 0.127: v24.38,4.7 24.77,4.32 24.77,3.75 J301.19
BUS2_SERCOM_P2  (via drill 0.25)
  Top 0.127: v25.97,4.7 25.65,4.38 25.65,3.81 J1.23
  Bottom 0.127: v25.97,4.7 26.35,4.32 26.35,3.75 J301.27
BUS2_SERCOM_P3  (via drill 0.25)
  Top 0.127: v27.65,4.7 27.52,4.57 27.43,4.57 27.24,4.38 27.24,3.81 J1.31
  Bottom 0.127: v27.65,4.7 27.94,4.41 27.94,3.75 J301.35
BUS3_AIN0  (via drill 0.25)
  Top 0.127: v23.25,7.52 22.86,7.12 22.86,6.41 J1.10
  Bottom 0.127: v23.25,7.52 23.25,7.44 23.56,7.14 23.56,6.48 J301.14
BUS3_AIN1  (via drill 0.25)
  Top 0.127: v24.64,7.37 24.64,7.24 24.45,7.05 24.45,6.41 J1.18
  Bottom 0.127: v24.64,7.37 25.15,6.86 25.15,6.48 J301.22
BUS3_GPIO0  (via drill 0.25)
  Top 0.127: v26.42,7.37 26.04,6.99 26.04,6.41 J1.26
  Bottom 0.127: v26.42,7.37 26.8,6.99 26.8,6.48 J301.30
BUS3_GPIO1  (via drill 0.25)
  Top 0.127: v28.05,7.42 27.62,6.99 27.62,6.41 J1.34
  Bottom 0.127: v28.05,7.42 28.38,7.09 28.38,6.48 J301.38
BUS3_SERCOM_P0  (via drill 0.25)
  Top 0.127: v23.56,2.79 23.18,2.79 22.86,3.11 22.86,3.75 J1.9
  Bottom 0.127: v23.56,2.79 23.56,3.68 J301.13
BUS3_SERCOM_P1  (via drill 0.25)
  Top 0.127: v24.83,2.79 24.64,2.98 24.57,2.98 24.45,3.11 24.45,3.75 J1.17
  Bottom 0.127: v24.83,2.79 25.15,3.11 25.15,3.68 J301.21
BUS3_SERCOM_P2  (via drill 0.25)
  Top 0.127: v26.42,2.79 26.04,3.17 26.04,3.75 J1.25
  Bottom 0.127: v26.42,2.79 26.8,3.17 26.8,3.68 J301.29
BUS3_SERCOM_P3  (via drill 0.25)
  Top 0.127: v28,2.79 27.62,3.17 27.62,3.75 J1.33
  Bottom 0.127: v28,2.79 28.38,3.17 28.38,3.68 J301.37
D_N
  Top 0.229: J7.D- 27.32,37.98 26.35,37.01 22.78,37.01 21.59,35.81 21.59,31.24 22.33,30.5 U$4.33
D_P
  Top 0.229: J7.D+ 26.67,37.98 26.03,37.34 22.65,37.34 21.26,35.95 21.26,31.11 22.36,30 U$4.34
DTR_DETECT_IN  (via drill 0.25)
  Top 0.127: DETECT_IN.TP 29.34,2.52 v29.34,2.67
  Route15 0.127: v13.21,38.92 13.02,38.92 12.32,38.23 12.32,31.37 13.02,30.67 13.02,21.02 17.06,16.98 17.06,10.75 20.52,7.29 20.75,7.06 20.75,4.95 23.8,1.91 28.57,1.91 v29.34,2.67
  Bottom 0.127: v29.34,2.67 28.83,3.17 28.83,3.68 J301.39 | ATTINY-817.18 13.84,38.48 13.4,38.92 v13.21,38.92
DTR_DETECT_OUT  (via drill 0.25, 0.35)
  Top 0.127: v29.31,1.17 28.65,1.83 DETECT_OUT.TP 28.37,2.21 28.8,2.64 J1.39
  Route2 0.127: v12.76,38.04 12.76,30.99 13.74,30.01 13.74,10.39 22.96,1.17 v29.31,1.17
  Bottom 0.127: ATTINY-817.19 13.59,39.18 13.4,39.37 13.02,39.37 12.76,39.12 v12.76,38.04
EN_BARO  (via drill 0.25)
  Top 0.127: U8.C2 18.03,25.89 18.03,29.06 EN_BARO.TP 19.15,30.43 19.74,31.02 19.74,32.18 19.15,32.77 19.15,35.87 v18.92,36.09
  Bottom 0.127: ATTINY-817.5 18.57,36.45 v18.92,36.09
EN_IMU  (via drill 0.25)
  Top 0.127: U9.C2 15.57,25.07 14.48,26.16 14.48,28.88 EN_IMU.TP 15.8,30.71 15.44,31.07 15.44,32.97 17.49,35.02 17.49,39.22 17.75,39.48 18.12,39.48 18.63,38.96 v18.67,38.96
  Bottom 0.127: ATTINY-817.2 18.41,37.97 18.8,38.35 18.8,38.84 v18.67,38.96
EN_MEAS  (via drill 0.25)
  Top 0.127: 25.84,16.51 26.86,16.51 EN_MEAS.TP | 25.84,16.51 25.84,14.86 26.23,14.48 26.73,14.48 U3.4 | 25.84,16.51 v25.73,16.51
  Route2 0.127: v14.86,32.77 14.86,32.07 23.18,23.75 23.18,19.06 v25.73,16.51
  Bottom 0.127: v14.86,32.77 ATTINY-817.12
EN_MIC  (via drill 0.25)
  Top 0.127: U10.C2 18.95,14.89 17.27,13.21 15.49,13.21 14.22,14.48 14.22,16.51 16.76,19.05 16.76,20.57 17.53,21.34 17.53,32.51 17.58,32.56 EN_MIC.TP | v17.93,39.04 18.03,38.94 18.03,34.29
  Top 0.152: EN_MIC.TP 17.58,33.7 18.03,34.16 18.03,34.29
  Bottom 0.127: ATTINY-817.1 17.93,38.65 v17.93,39.04
EN_RADIO  (via drill 0.25)
  Top 0.127: 20.57,24.07 20.57,33.85 v19.62,34.8 20.57,35.75 20.57,39.37 EN_RADIO.TP | 20.57,24.07 20.57,23.37 21.46,22.48 U1.C2 | v24.26,24.07 U7.C2 | 20.57,24.07 v22.23,24.07
  Bottom 0.127: v19.62,34.8 19.24,34.8 ATTINY-817.6 | v22.23,24.07 v24.26,24.07
GND  (via drill 0.25, 0.3, 0.35)
  Top 0.127: 26.42,28.96 26.42,29.21 26.67,29.46 U$4.THERMAL 27.11,32.19 27.11,34.68 26.92,34.87 U$4.18 | C1.2 26.42,27.96 U$4.42 | v16.51,13.65 16.51,14.67 15.75,15.43 15.75,15.88 C7.2 | v15.24,16.83 15.68,16.38 16.07,16.38 17.72,18.03 18.48,18.03 U5.6 | v22.73,16.57 22.73,14.99 U3.6 | v18.57,27.38 18.57,26.83 C20.2 | A1.G1 37.47,17.61 37.47,17.14 37.27,17.34 34.86,17.34 34.48,17.34 33.41,16.26 C5.1
  Top 0.152: U$4.35 23.48,29.5 23.77,29.79 23.77,31.65 23.88,31.75 U$4.THERMAL | U$4.42 26.42,28.96 | 11.64,1.02 11.43,1.02 11.43,0.76 11.58,0.91 | X6.2 11.79,4.89
  Top 0.229: U8.C1 18.6,26.64 C20.2 | U9.C1 C22.2 | v18.21,24.92 18.65,24.48 C19.2 | 37.33,25.9 v37.47,26.04 | X4.2 36.65,32.03 v36.75,32.13
  Top 0.254: U$4.5 27.42,31 U$4.THERMAL
  Top 0.5: 34.86,17.34 C28.1 L1.2
  Top 0.914: A1.G1 37.33,25.9
  Route2 0.152: v17.88,40.44 17.88,39.6 17.5,39.22 17.5,38.63 v20.07,36.07
  Bottom 0.152: v18.21,24.92 18.56,24.92 U205.3 | U11.6 16.59,30.66 16.51,30.73 16.51,31.24 17.11,31.24 U11.7 | C13.1 20.36,36.37 v20.07,36.07 | ATTINY-817.3 18.3,37.67 18.59,37.67 19.1,38.18 19.1,39.22 v17.88,40.44
  Bottom 0.229: U2.2 19.33,14.83 20.32,13.84 20.37,13.84 20.37,13.93 C8.2 | ATTINY-817.3 18.27,37.63 18.6,37.63 18.75,37.77 18.75,37.8 | U205.3 18.56,24.17 18.54,24.16
  Bottom 0.305: J301.3 21.6,3.06 21.59,3.05 21.2,3.44 J301.1
  other vias: 19.05,3.3 10.67,39.37 25.5,25.4 22.38,23.44 15.24,27.24 17.73,15.01 19.1,20.98 26.52,22.02 21.08,13.21 23.88,21.03 34.92,33.66
  pour Bottom: -0.64,44.45 -0.64,-1.27 39.37,-1.27 39.37,8.26 28.32,8.26 28.32,19.05 38.1,19.05 38.73,19.68 38.73,44.45
  pour Top: -0.64,44.7 -0.64,-1.27 39.37,-1.27 39.37,8.26 30.96,8.26 28.7,8.38 28.45,8.64 28.45,18.8 34.03,18.8 34.03,20.83 39.24,20.83 39.24,44.7
  pour Route2: -0.25,43.94 -0.25,0 0.51,-0.76 38.35,-0.76 38.35,8.13 38.1,8.38 27.69,8.38 27.69,18.54 33.78,18.54 33.78,21.08 34.29,21.59 38.1,21.59 38.35,21.84 38.35,43.94
  pour Route15: -1.02,44.45 -1.02,-1.02 -0.51,-1.52 39.12,-1.52 39.37,-1.27 39.37,8.13 38.86,8.64 27.69,8.64 27.69,18.54 33.27,18.54 33.53,18.8 38.35,18.8 38.35,44.45
IN+
  Bottom 0.229: C8.1 18.38,14.32 U2.3 18.04,15.56 R4.2
  Bottom 0.254: C8.1 18.63,12.74 R3.1
IN-
  Bottom 0.203: R2.2 18.29,19.29 18.29,18.18 U2.4 | R1.1 18.66,19.86 18.78,19.99
  Bottom 0.254: 18.78,19.99 R2.2
LORA_CS  (via drill 0.25)
  Top 0.127: U$4.11 29.63,34 v29.41,33.78
  Bottom 0.127: v29.41,33.78 30.69,35.06 U4.13P
LORA_IRQ0  (via drill 0.25)
  Top 0.127: U$4.14 28.92,34.71 v28.7,34.49
  Bottom 0.127: v28.7,34.49 28.7,31.88 27.18,30.35 27.18,21.07 U4.6P
LORA_IRQ1  (via drill 0.25)
  Top 0.127: v23.93,32.54 23.89,32.5 U$4.29
  Bottom 0.127: v23.93,32.54 24.69,31.77 U4.7P
LORA_MISO  (via drill 0.25)
  Top 0.127: U$4.21 25.3,35.1 v25.3,34.49
  Bottom 0.127: v25.3,34.49 24.79,35 24.79,36.69 U4.10P
LORA_MOSI  (via drill 0.25)
  Top 0.127: U$4.19 26.42,34.74 v26.67,34.49
  Bottom 0.127: v26.67,34.49 26.67,36.77 U4.11P
LORA_RST  (via drill 0.25)
  Top 0.127: v29.54,36.07 29.54,35.34 U$4.13
  Bottom 0.127: v29.54,36.07 29.54,37.54 30.23,38.23 31.75,38.23 32.69,37.28 U4.14P
LORA_SCK  (via drill 0.25)
  Top 0.127: U$4.20 25.98,35.16 v25.98,34.49
  Bottom 0.127: 28.69,35.42 U4.12P
  Bottom 0.152: v25.98,34.49 26.44,34.04 27.33,34.04 28.69,35.4 28.69,35.42
MASTER_I2C_SCL  (via drill 0.25)
  Top 0.127: v28.83,7.37 28.83,6.41 J1.40 28.8,5.56 v28.68,5.44 | v32.07,5.97 32.94,5.97 ATT_SCL.TP
  Route15 0.127: v13.23,37.64 12.98,37.39 12.98,31.07 13.27,30.78 13.27,21.29 18.22,16.34 18.22,11.95 24.23,5.94 28.17,5.94 v28.68,5.44
  Bottom 0.127: J301.40 28.83,6.48 v28.83,7.37 29.27,7.81 29.78,7.81 31.62,5.97 v32.07,5.97 | ATTINY-817.16 13.41,37.47 v13.23,37.64
MASTER_I2C_SDA  (via drill 0.25)
  Top 0.127: v30.38,5.21 32.28,7.11 32.92,7.11 ATT_SDA.TP | J1.42 29.21,5.54 v29.34,5.41
  Route15 0.127: v29.34,5.41 28.55,6.2 25.18,6.2 18.54,12.84 18.54,16.41 13.53,21.43 13.53,30.88 13.4,31.01 v13.4,36.89
  Bottom 0.127: J301.42 29.21,6.41 29.21,5.54 v29.34,5.41 29.54,5.21 v30.38,5.21 | v13.4,36.89 13.46,36.96 ATTINY-817.15
MEAS_BARO  (via drill 0.25)
  Top 0.127: U5.8 17.88,19.05 17.02,19.91 17.02,20.47 17.78,21.23 17.78,30.38 19,31.6 MEAS_BARO.TP | v18.03,33.47 19.24,32.26 19.24,31.75
  Top 0.229: MEAS_BARO.TP 19.2,31.75 19.24,31.75
  Bottom 0.127: ATTINY-817.9 16.38,34.1 17.02,33.47 v18.03,33.47
MEAS_IMU  (via drill 0.25)
  Top 0.127: 16.27,31.51 17.27,30.5 17.27,21.59 16.51,20.83 16.51,19.52 15.54,18.55 U5.4 | 16.14,31.64 MEAS_IMU.TP 16.13,32.89 v17.2,33.96
  Top 0.229: 16.14,31.64 16.27,31.51
  Bottom 0.127: v17.2,33.96 16.89,34.27
  Bottom 0.152: 16.89,34.27 ATTINY-817.8
MEAS_MIC  (via drill 0.25)
  Top 0.127: v22.15,17.84 21.4,17.09 21.4,15.94 21.78,15.56 21.78,14.35 22.16,13.97 U3.8 | v18.61,33.78 18.61,33.97 18.3,34.28 18.3,36.31 18.29,36.32 MEAS_MIC.TP
  Route15 0.127: v18.61,33.78 19.58,32.8 19.58,19.61 21.35,17.84 v22.15,17.84
  Bottom 0.127: ATTINY-817.7 17.4,34.8 17.59,34.8 v18.61,33.78
MEAS_RFM  (via drill 0.25)
  Top 0.127: 26.16,19.94 26.73,19.94 U6.4 26.16,19.94 | v26.23,23.62 27.37,23.62 27.88,23.11 27.88,22.35 | 27.88,22.35 27.88,21.4 27.18,20.7 26.04,20.7 25.84,20.51 25.84,20.26 26.16,19.94 | 27.88,22.35 28.83,21.4 MEAS_RFM.TP
  Route2 0.127: v16.7,32.83 17.4,32.83 20.57,29.65 20.57,29.59 26.23,23.94 v26.23,23.62
  Bottom 0.127: ATTINY-817.11 15.37,33.91 16.45,32.83 v16.7,32.83
MEAS_SAMD  (via drill 0.25)
  Top 0.127: v24.26,23.43 24.32,23.37 24.32,19.68 24.07,19.43 22.8,19.43 U6.8 | v15.88,34.04 15.88,35.43 MEAS_SAMD.TP
  Route2 0.127: v15.88,34.04 15.88,31.81 v24.26,23.43
  Bottom 0.127: v15.88,34.04 ATTINY-817.10
N$1
  Top 0.254: C1.1 26.73,27.42 26.95,27.64 26.95,28.25 U$4.43
N$2
  Top 0.61: SJ3.3 34.64,29.44 X4.3
N$3
  Bottom 0.127: SJ1.3 13.08,33.97 14.41,32.64 14.41,32.58 14.67,32.32 17.08,32.32 17.78,33.02 18.48,33.02 20.89,35.43 20.89,38.1 17.14,41.85 16.38,41.85 J2.5
N$4
  Top 0.254: C3.2 37.28,9.44 A1.G2 33.61,9.44
  Top 0.305: 33.61,9.44 C5.2
N$5
  Top 0.127: U$4.1 31.6,27.55 X2.P$1 30.06,27.35 C2.1
N$6
  Bottom 0.203: R1.2 16.78,18.97 C6.2
N$7
  Top 0.127: U$4.2 31.35,29.5 X2.P$2 32.44,30.59 C4.1
N$8
  Top 0.305: R_SENSE.2 24.77,9.26 JP13.1
N$9
  Top 0.5: C26.1 33.87,25.42 SJ3.1
N$10
  Bottom 0.229: C204.1 18.27,22.76 U205.2
N$11
  Top 0.152: X6.3 13.2,6.86 R7.1
N$12  (via drill 0.35)
  Top 0.127: SW1.2 SW1.4 3.81,33.19 v3.81,32.26
  Bottom 0.127: v3.81,32.26 R3-39R.1
N$13
  Top 0.5: L1.1 C27.1 C26.2
N$17
  Top 0.229: J7.VBUS 27.97,38.07 28.7,37.34 29.46,37.34 31.75,39.62 USB_V.TP
N$18
  Bottom 0.127: SJ1.2 12.55,34.29 12.55,34.7 13.15,35.31 13.77,35.31 14.16,35.7 ATTINY-817.13
N$19
  Bottom 0.127: ATTINY-817.14 11.71,36.45 SJ2.2
N$20
  Bottom 0.127: SJ2.3 11.62,39.69 13.78,41.85 J2.4
N$22
  Bottom 0.127: X1.P$1 9.78,34.05 | 9.78,34.05 11.36,34.05 SJ1.1 | C16.2 9.25,33.53 9.78,34.05
N$23
  Bottom 0.127: SJ2.1 10.42,35.74 X1.P$2
  Bottom 0.229: C15.2 9.2,36.96 X1.P$2
N$26  (via drill 0.25)
  Top 0.406: SJ3.2 34.65,26.94 v35.56,26.04
  Bottom 0.254: 36.83,20.32 36.83,20.45 U4.1P
  Bottom 0.406: v35.56,26.04 36.83,24.77 36.83,20.32
OUT  (via drill 0.25)
  Top 0.229: MK1.1 15.16,14.3 v14.73,14.73
  Bottom 0.254: v14.73,14.73 14.73,18.05 C6.1
SAMD_!RESET  (via drill 0.25, 0.35)
  Top 0.127: v29.52,21.77 30.47,20.82 | U$4.40 25.4,28.3 v25.4,29.01 | v32.96,29.4 36.39,32.83 36.89,32.83 J3.10
  Top 0.152: 30.47,20.82 30.57,20.71 SW2.2 SW2.4
  Route2 0.127: v25.4,29.01 28.98,25.43 | 28.98,25.43 29.52,24.89 v29.52,21.77 | 28.98,25.43 v32.96,29.4
SWCLK  (via drill 0.25, 0.35)
  Top 0.127: U$4.45 27.92,28.9 v27.81,29.01 | J3.4 36.22,36.68 v35.56,37.34
  Route2 0.127: v27.81,29.01 27.81,29.59 v35.56,37.34
SWDIO  (via drill 0.25, 0.35)
  Top 0.127: v28.5,29.01 28.5,28.35 U$4.46 | v35.56,38.35 35.97,37.95 J3.2
  Route2 0.127: v35.56,38.35 27.37,30.16 27.37,28.82 27.63,28.57 28,28.57 28.44,29.01 v28.5,29.01
V_SENSE_IN  (via drill 0.25)
  Top 0.127: J1.43 30.77,2.59 JP16.2 31.73,3.02 32.77,4.06 33.43,4.06 34.29,4.93 34.29,7.11 33.53,7.87 v31.5,7.87 | v26.26,15.62 26.44,15.62 26.44,15.32 26.73,15.02 26.73,14.99 U3.5
  Route15 0.127: v26.26,15.62 26.26,15.6 24.98,14.31 24.98,9.31 26.42,7.87 v31.5,7.87
V_SENSE_OUT  (via drill 0.25)
  Top 0.127: v25.65,13.84 26.61,13.84 26.73,13.97 U3.3
  Bottom 0.127: v25.65,13.84 26.35,13.14 26.35,9.54 27.8,8.09 30.58,8.09 32.77,5.91 32.77,4.76 32.26,4.25 29.78,4.25 29.65,4.13 29.65,3.75 J301.43

## Text on the board
tPlace: SAMD21 PROG | SAMD21 DEBUG | SAMD21 | ATTINY RESET | ATTINY DEBUG | IMU PWR IN | BARO PWR IN | SAMD PWR IN | IMU PWR | BARO PWR | RFM PWR | RFM PWR IN | U.Fl | SAMD PWR | CHIP ANT | SAMD21 RESET | ILA.09 | MIC PWR IN | PWR (SENSE R) | MIC-SPW2430 | MIC PWR | PWR (NO SENSE R) | CommonSense Daughter Board v1 / Eve Hu | L | O | S
bPlace: ATTINY-817 | IMU-BMI160 | MPL3115